# EAGLE board hw_interface_board (EAGLE 8.5.0)
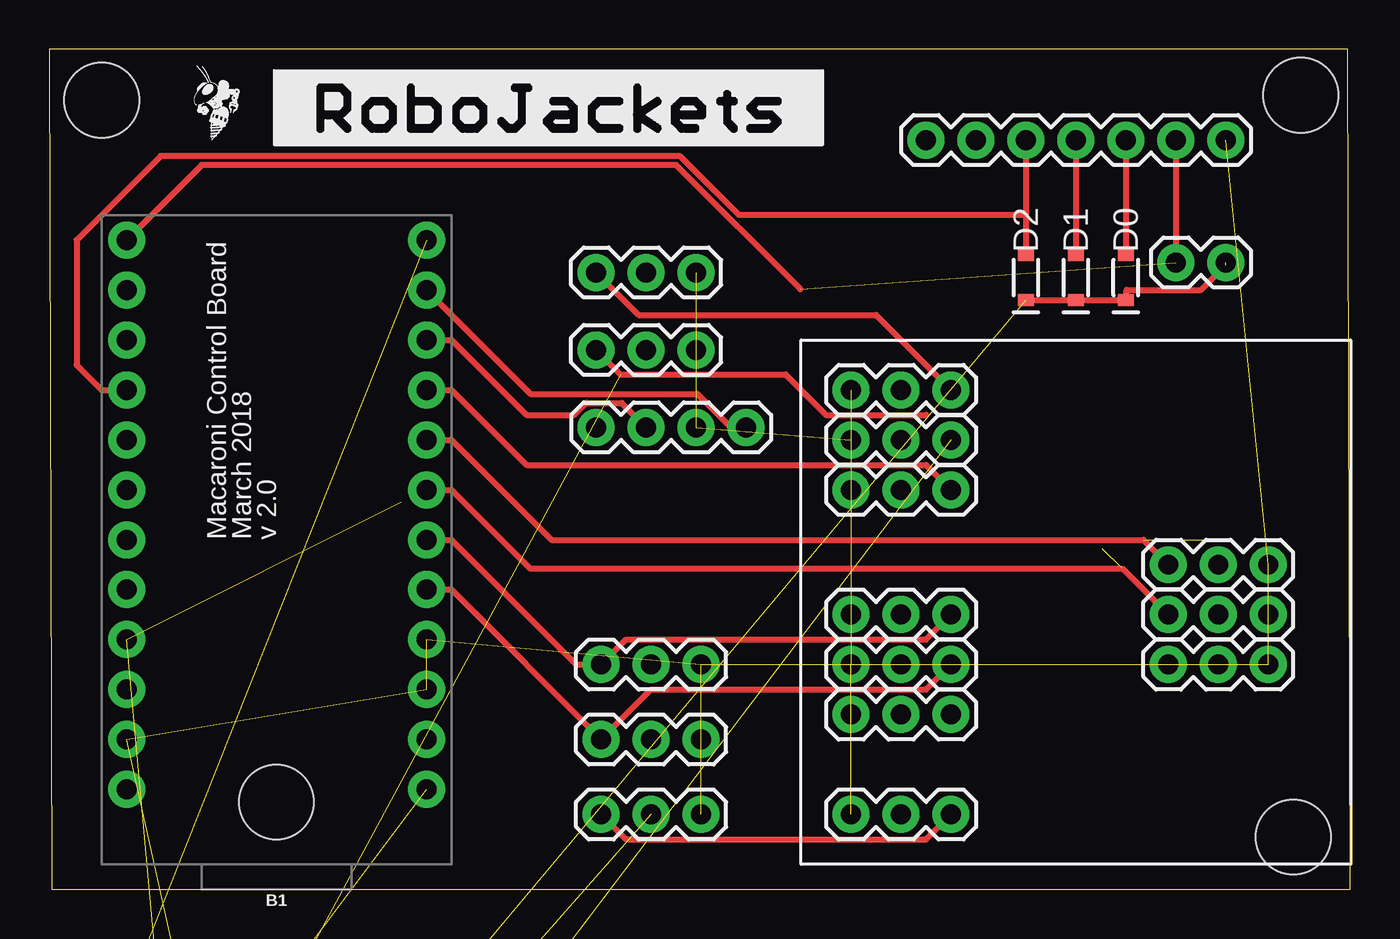
[diagram p0: board, top side]
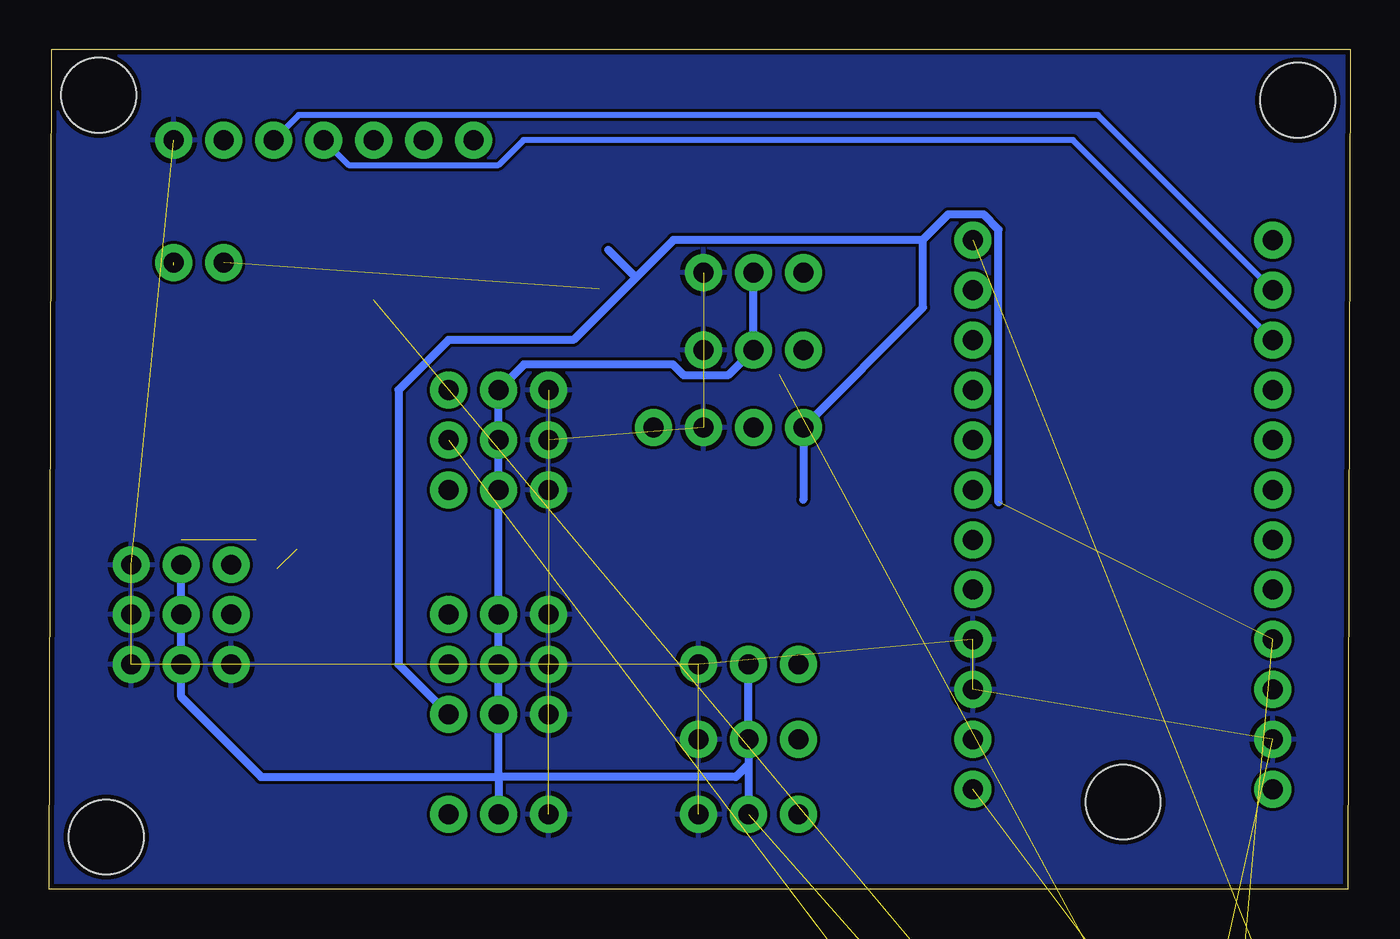
[diagram p1: board, bottom side, seen from below]

Size 66.15 x 42.72 mm. Coordinates in mm from the lower left corner, seen from the top.
Outline: 0.13,0 66.15,0 66.02,42.72 0,42.72 0.13,0
Copper layers (1*16): Top 0.035mm / dielectric 1.5mm / Bottom 0.035mm
Design rules "SeeedStudio_2layer_DRU_no_angle_20140221": minimum track width 6mil, minimum drill 12mil, track to track 6mil, track to pad 6mil, pad to pad 6mil, via to via 6mil, smd to smd 0mil, copper to edge 10mil, drill to drill 10mil, minimum pad ring 10mil, minimum via ring 6mil, stop-mask expansion 2mil, vias tented up to drill 100mil, thermal gap 10mil
Holes 3.8 mm at 2.67,40.13 11.56,4.45 63.63,40.39 63.25,2.67

## Footprints (pad centres in the part's own frame; a part is rotated, then mirrored left to right if it is on the bottom)
SPARKFUN_PRO_MICRO = drill 1.016 pad 1.88: 1 -7.62,12.7; 2 -7.62,10.16; 3 -7.62,7.62; 4 -7.62,5.08; 5 -7.62,2.54; 6 -7.62,0; 7 -7.62,-2.54; 8 -7.62,-5.08; 9 -7.62,-7.62; 10 -7.62,-10.16; 11 -7.62,-12.7; 12 -7.62,-15.24; 13 7.62,-15.24; 14 7.62,-12.7; 15 7.62,-10.16; 16 7.62,-7.62; 17 7.62,-5.08; 18 7.62,-2.54; 19 7.62,0; 20 7.62,2.54; 21 7.62,5.08; 22 7.62,7.62; 23 7.62,10.16; 24 7.62,12.7
SOD-323 = smd 0.63 x 0.83: A 1.15,0; C -1.15,0
SOT89 = smd 1 x 1.5: 1 -1.499,-1.981; 3 1.499,-1.981 | smd 1 x 2: 2 0,-1.727 | smd 2.2 x 3.7: 2@1 0,0.94
1X02 = drill 1.016 pad 1.88: 1 0,0; 2 2.54,0
1X07 = drill 1.016 pad 1.88: 1 0,0; 2 2.54,0; 3 5.08,0; 4 7.62,0; 5 10.16,0; 6 12.7,0; 7 15.24,0
1X04 = drill 1.016 pad 1.88: 1 0,0; 2 2.54,0; 3 5.08,0; 4 7.62,0
1X03 = drill 1.016 pad 1.88: 1 0,0; 2 2.54,0; 3 5.08,0
EC2NU = drill 0.762 pad 1.27: 1 -5.08,12.725; 3 -5.08,7.645; 4 -5.08,5.105; 5 -5.08,2.565; 8 0,2.565; 9 0,5.105; 10 0,7.645; 12 0,12.725

## Placement (x,y rotation side)
B1  SPARKFUN PRO MICRO  [SPARKFUN_PRO_MICRO]  11.56,17.78 180 top
D0  250mA/100V  [SOD-323]  54.74,31.11 90 top
D1  250mA/100V  [SOD-323]  52.2,31.11 90 top
D2  250mA/100V  [SOD-323]  49.66,31.11 90 top
G1  5V VOLTAGE REGULATOR  [SOT89]  -25.27,-55.88 0 top  (outside the outline)
J1  E-STOP INTERFACE  [1X02]  57.28,31.88 0 top
J2  AUDIO BOARD INPUT  [1X02]  -22.73,-72.39 0 top  (outside the outline)
J4  WIRELESS E-STOP  [1X07]  44.58,38.1 0 top
J5  ENCODER INPUT  [1X04]  27.81,23.5 0 top
J6  ESC OUTPUT  [1X03]  32.89,27.43 180 top
J7  SERVO OUTPUT  [1X03]  32.89,31.37 180 top
J8  SELECT  [1X03]  40.77,3.81 0 top
J9  OUTPUT 3  [1X03]  40.77,20.32 0 top
J10  OUTPUT 2  [1X03]  40.77,22.86 0 top
J11  OUTPUT 1  [1X03]  40.77,25.4 0 top
J12  MASTER 1  [1X03]  40.77,13.97 0 top
J13  MASTER 2  [1X03]  40.77,11.43 0 top
J14  MASTER 3  [1X03]  40.77,8.89 0 top
J15  SLAVE 1  [1X03]  61.98,16.51 180 top
J16  SLAVE 2  [1X03]  61.98,13.97 180 top
J17  SLAVE 3  [1X03]  61.98,11.43 180 top
J18  RC SERVO INPUT  [1X03]  33.15,11.43 180 top
J19  RC ESC INPUT  [1X03]  33.15,7.62 180 top
J20  RC BUTTON INPUT  [1X03]  33.15,3.81 180 top
J23  AUDIO BOARD POWER  [1X03]  3.94,-15.24 0 top  (outside the outline)
K1  EC2-5NU  [EC2NU]  -8.76,-58.42 0 top  (outside the outline)
U$1  [ROBOBUZZ_0.2X]  8.25,38.1 0 top
U$2  [ROBOJACKETS]  11.43,37.85 0 top

## Library data of the parts
B1 = SparkFun-Boards
D0 D1 D2 = SparkFun-DiscreteSemi; PROD_ID: DIO-09646
G1 = hw_interface_board
J1 J2 J4 = SparkFun-Connectors
J5 = SparkFun-Connectors; PROD_ID: CONN-09696
J6-J20 J23 = SparkFun-Connectors; PROD_ID: XXX-00000
K1 = hw_interface_board; MANUFACTURER_PART_NUMBER: EC25NU; VENDOR: KEMET
U$1 U$2 = RoboJackets-Aesthetics

## Nets
5V: B1.21 J5.1 J14.3 J23.2
ARD_SPEAKER_OUTPUT: B1.12 J2.1
ARDUINO_ESC: B1.7 J16.3
ARDUINO_SERVO: B1.8 J15.3
E-STOP_INPUT: B1.13 J1.1 J4.6
ENCODER_A: B1.10 J5.2
ENCODER_B: B1.11 J5.4
ESC_5V: D0.C D1.C D2.C G1.1 J1.2 K1.1
GND: B1.3 B1.4 B1.23 G1.2 G1.2@1 J2.2 J4.7 J5.3 J6.1 J7.1 J8.1 J9.1 J10.1 J11.1 J12.1 J13.1 J14.1 J15.1 J16.1 J17.1 J17.3 J18.1 J19.1 J20.1 J23.3 K1.12
MUX_ESC: J10.3 K1.5
MUX_SEL_READ: B1.9 J9.3
OUT_ESC: J6.3 K1.4
OUT_SERVO: J7.3 J11.3
RAW: B1.24
RC_BUTTON: J8.3 J20.3
RC_ESC: B1.5 J13.3 J19.3
RC_SERVO: B1.6 J12.3 J18.3
SPEAKER_ENABLE: B1.1 J23.1
VCC: G1.3 J6.2 J7.2 J8.2 J9.2 J10.2 J11.2 J12.2 J13.2 J14.2 J15.2 J16.2 J17.2 J18.2 J19.2 J20.2
WIRELESS_D0: B1.14 D0.A J4.5
WIRELESS_D1: B1.15 D1.A J4.4
WIRELESS_D2: B1.16 D2.A J4.3
WIRELESS_D3: J4.2

## Tracks (layer width: path | path; a pad name or v marks a point on that pad's centre or on a via)
5V  (2 unrouted)
  Bottom 0.406: J14.3 48.39,11.43 48.39,25.4 45.85,27.94 39.5,27.94 36.32,31.11 | 27.81,19.81 J5.1 21.72,29.59 21.72,33.02 | 36.32,31.11 34.42,33.02 21.72,33.02 | 17.88,19.7 17.88,33.56 18.64,34.32 20.45,34.32 21.72,33.05 21.72,33.02 | 36.32,31.11 37.72,32.51
ARD_SPEAKER_OUTPUT  (1 unrouted)
ARDUINO_ESC  (1 unrouted)
  Top 0.305: B1.7 20.45,20.32 24.45,16.32 54.55,16.32 J16.3
ARDUINO_SERVO  (1 unrouted)
  Top 0.305: B1.8 20.45,22.86 25.53,17.78 55.63,17.78 J15.3
E-STOP_INPUT  (1 unrouted)
  Top 0.305: J4.6 J1.1 | 38.19,30.52 31.88,36.83 7.75,36.83 B1.13
ENCODER_A
  Top 0.305: J5.2 29.11,24.74 27.3,24.74 26.69,24.13 24.26,24.13 23.62,24.77 20.45,27.94 B1.10
ENCODER_B
  Top 0.305: J5.4 34.65,23.5 32.95,25.2 24.46,25.2 B1.11
ESC_5V  (3 unrouted)
  Top 0.305: D2.C D1.C D0.C 54.77,30.48 58.55,30.48 59.82,31.75
GND  (25 unrouted)
  pour Bottom: -1.14,43.18 67.44,43.18 67.44,0 -1.14,0
MUX_ESC  (1 unrouted)
MUX_SEL_READ
  Top 0.305: J9.3 44.58,21.59 24.26,21.59 20.45,25.4 B1.9
OUT_ESC  (1 unrouted)
  Top 0.305: 44.58,24.13 39.5,24.13 37.44,26.19 29.06,26.19 J6.3
OUT_SERVO
  Top 0.305: J11.3 42.04,29.21 29.97,29.21 J7.3
RC_BUTTON
  Top 0.305: J20.3 29.34,2.54 44.58,2.54 J8.3
RC_ESC
  Top 0.305: B1.5 20.45,15.24 J19.3 30.61,10.16 44.58,10.16 J13.3
RC_SERVO
  Top 0.305: B1.6 20.45,17.78 26.8,11.43 J18.3 29.34,12.7 44.58,12.7 J12.3
SPEAKER_ENABLE  (1 unrouted)
VCC  (1 unrouted)
  Bottom 0.406: J18.2 J19.2 30.61,6.35 | 30.61,6.35 J20.2 | 30.61,6.35 31.24,5.71 43.31,5.71 | 43.31,5.71 J8.2 | 43.31,5.71 J14.2 J13.2 J12.2 J9.2 J10.2 J11.2 42.01,26.7 34.44,26.7 33.88,26.14 31.65,26.14 J6.2 J7.2 | 43.31,5.71 55.37,5.71 59.44,9.78 J17.2 J16.2 J15.2
WIRELESS_D0
  Top 0.305: J4.5 D0.A
  Bottom 0.305: B1.14 12.83,39.37 53.47,39.37 J4.5
WIRELESS_D1
  Top 0.305: J4.4 D1.A
  Bottom 0.305: B1.15 14.1,38.1 42.04,38.1 43.31,36.83 50.93,36.83 J4.4
WIRELESS_D2
  Top 0.305: J4.3 49.66,34.29 | 49.66,34.29 D2.A | 49.66,34.29 35.06,34.29 32.07,37.29 5.66,37.29 1.4,33.02 1.4,26.67 2.67,25.4 B1.16

## Text on the board
tPlace: Macaroni Control Board | March 2018 | v 2.0